# EAGLE board BoosterHC HAT V0_1 (EAGLE 8.1.0)
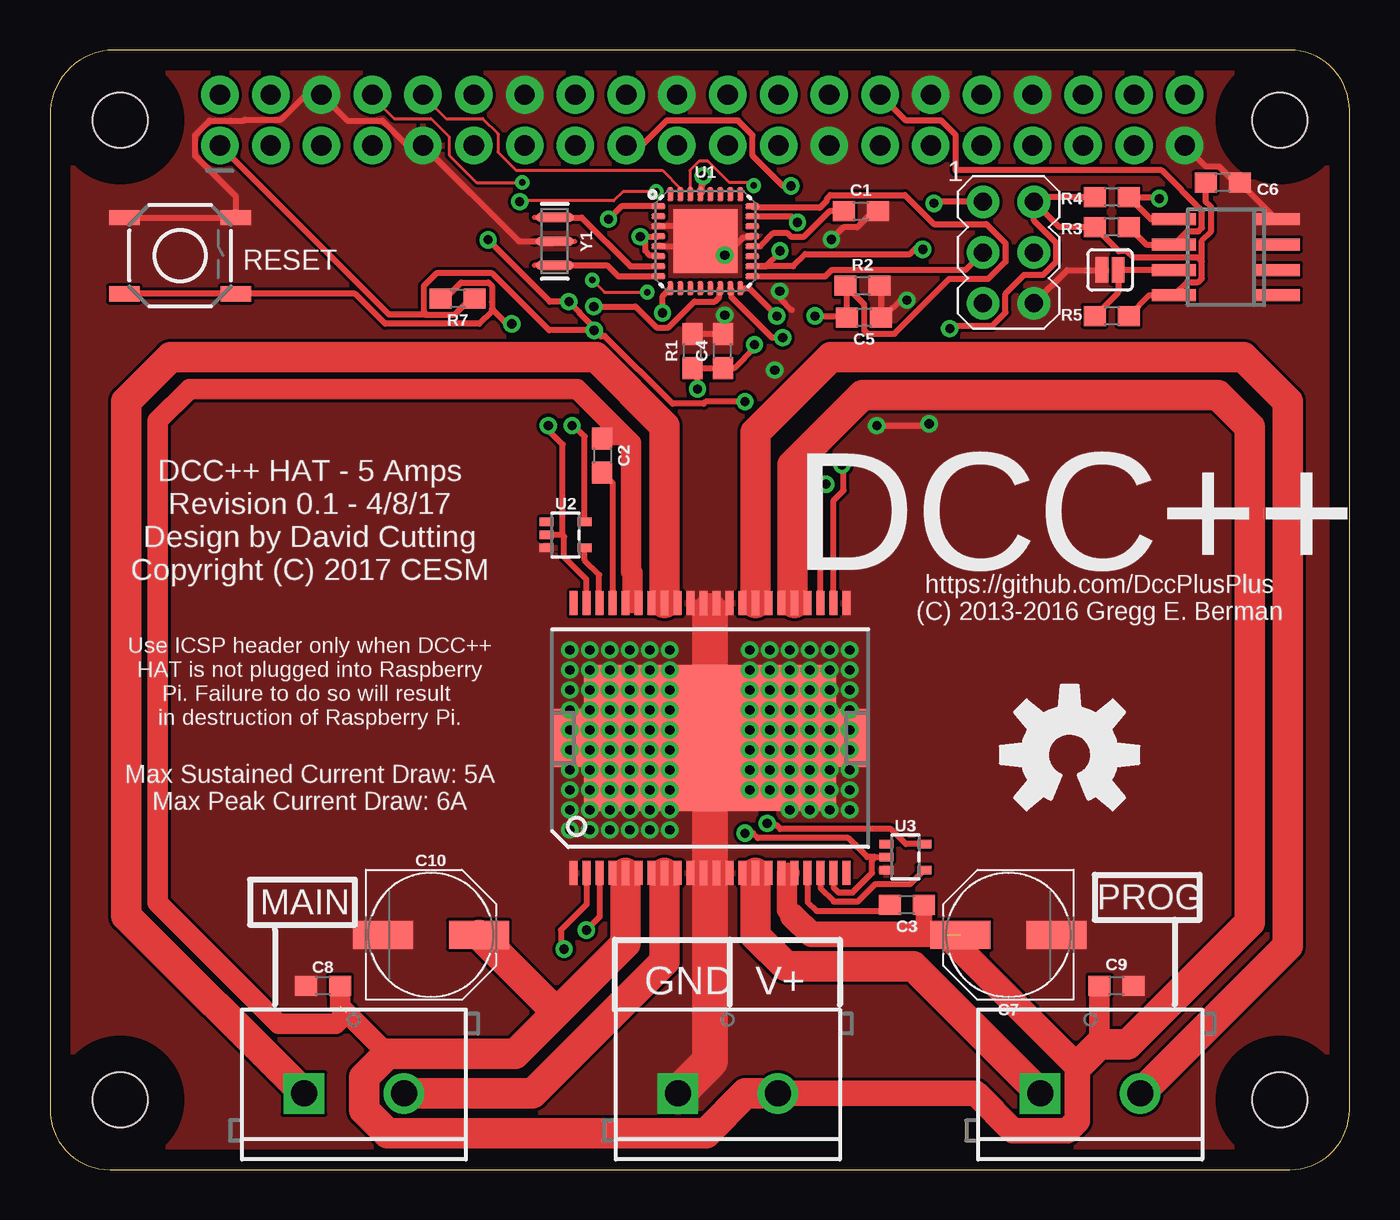
[diagram p0: board, top side]
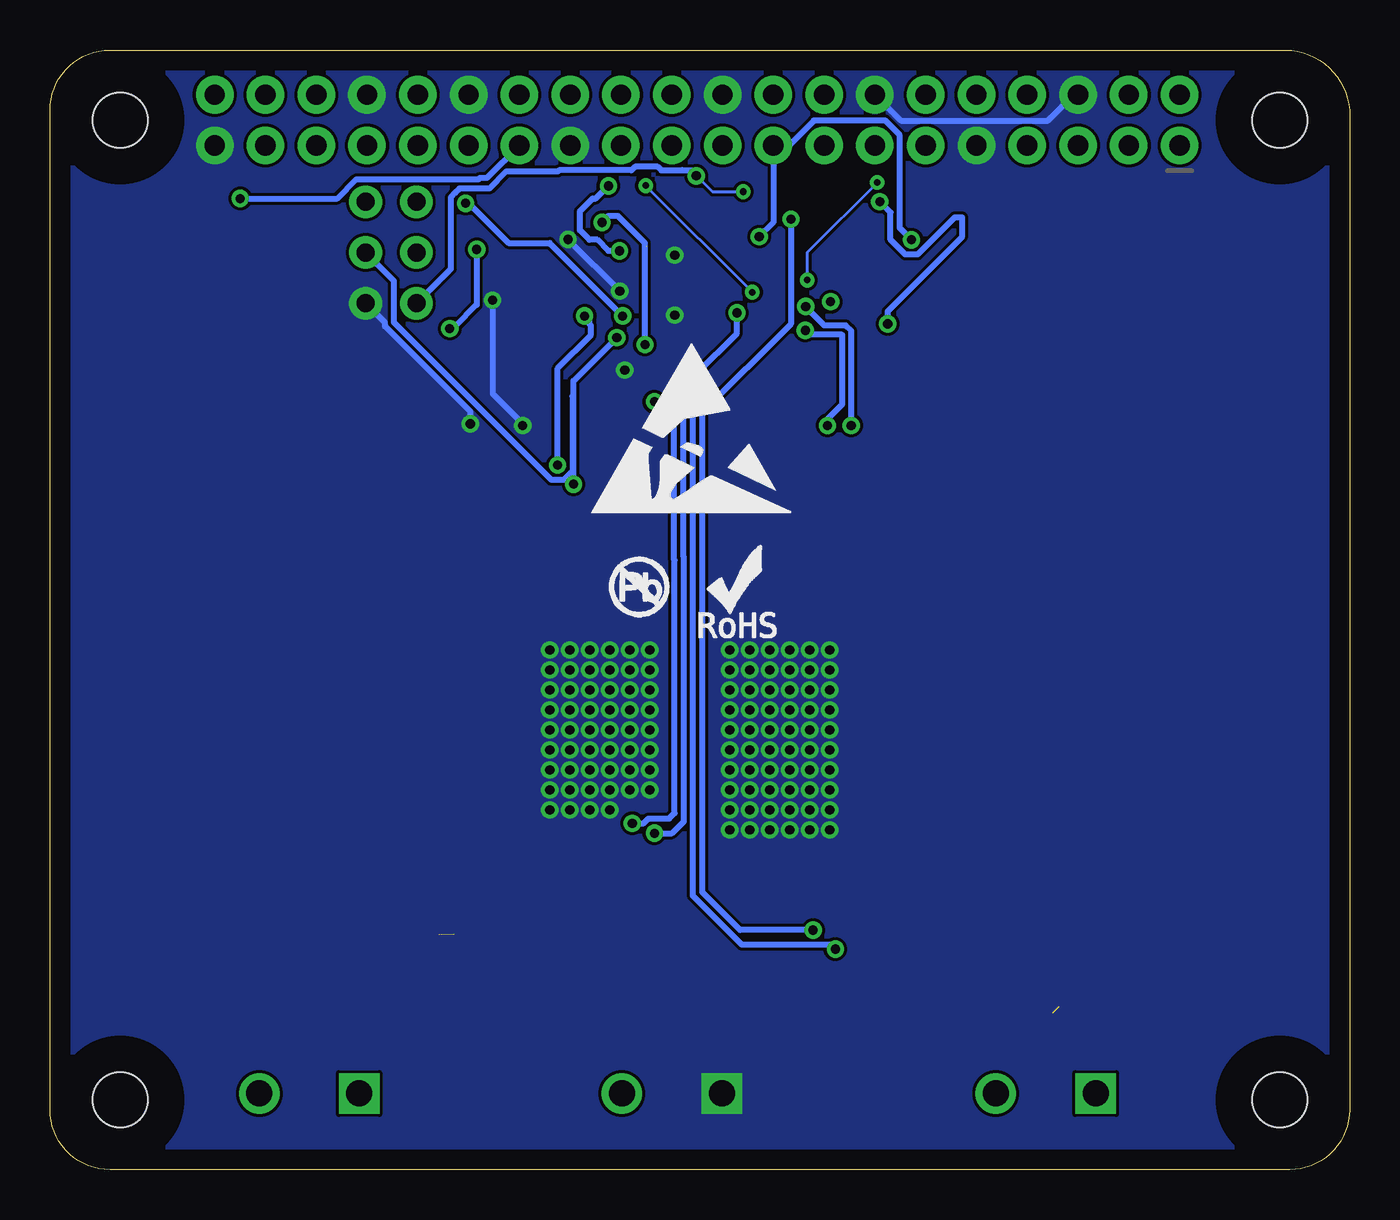
[diagram p1: board, bottom side, seen from below]

Size 65 x 56.01 mm. Coordinates in mm from the lower left corner, seen from the top.
Outline: 3,0 62,0 arc90 65,3 65,53 arc90 62,56 3.5,56 arc90 0,53 0,3 arc90 3,0
Copper layers (1*16): Top 0.035mm / dielectric 1.5mm / Bottom 0.035mm
Design rules "default *": minimum track width 6mil, minimum drill 13mil, track to track 6mil, track to pad 6mil, pad to pad 6mil, via to via 6mil, smd to smd 6mil, copper to edge 40mil, drill to drill 8mil, minimum pad ring 10mil, minimum via ring 8mil, stop-mask expansion 4mil, vias tented up to drill 25mil, thermal gap 0mil
Holes 2.75 mm at 3.5,3.5 61.5,3.5 3.5,52.5 61.5,52.5
tRestrict: area 1.9,1.9 to 5.1,5.1; area 59.9,1.9 to 63.1,5.1; area 1.9,50.9 to 5.1,54.1; area 59.9,50.9 to 63.1,54.1
bRestrict: area 1.9,50.9 to 5.1,54.1; area 1.9,1.9 to 5.1,5.1; area 59.9,1.9 to 63.1,5.1; area 59.9,50.9 to 63.1,54.1

## Footprints (pad centres in the part's own frame; a part is rotated, then mirrored left to right if it is on the bottom)
0603 = smd 1.1 x 1: 1 -0.85,0; 2 0.85,0
PANASONIC_D = smd 3 x 1.4: + 2.4,0; - -2.4,0
HSOP44 = smd 0.4 x 1.2: 1 -6.825,-6.75; 2 -6.175,-6.75; 3 -5.525,-6.75; 4 -4.875,-6.75; 5 -4.225,-6.75; 6 -3.575,-6.75; 7 -2.925,-6.75; 8 -2.275,-6.75; 9 -1.625,-6.75; 10 -0.975,-6.75; 11 -0.325,-6.75; 12 0.325,-6.75; 13 0.975,-6.75; 14 1.625,-6.75; 15 2.275,-6.75; 16 2.925,-6.75; 17 3.575,-6.75; 18 4.225,-6.75; 19 4.875,-6.75; 20 5.525,-6.75; 21 6.175,-6.75; 22 6.825,-6.75; 23 6.825,6.75; 24 6.175,6.75; 25 5.525,6.75; 26 4.875,6.75; 27 4.225,6.75; 28 3.575,6.75; 29 2.925,6.75; 30 2.275,6.75; 31 1.625,6.75; 32 0.975,6.75; 33 0.325,6.75; 34 -0.325,6.75; 35 -0.975,6.75; 36 -1.625,6.75; 37 -2.275,6.75; 38 -2.925,6.75; 39 -3.575,6.75; 40 -4.225,6.75; 41 -4.875,6.75; 42 -5.525,6.75; 43 -6.175,6.75; 44 -6.825,6.75 | smd 12.6 x 7.3: EH@1 0,0 | smd 1.7 x 2.9: EH@2 -7.15,0; EH@3 7.15,0
SO-08 = smd 0.6 x 2.2: 1 -1.905,-2.6; 2 -0.635,-2.6; 3 0.635,-2.6; 4 1.905,-2.6; 5 1.905,2.6; 6 0.635,2.6; 7 -0.635,2.6; 8 -1.905,2.6
AVRISP = drill 0.9 pad 1.626: 1 -1.27,2.54; 2 1.27,2.54; 3 -1.27,0; 4 1.27,0; 5 -1.27,-2.54; 6 1.27,-2.54
SCREWTERMINAL-5MM-2 = drill 1.3 pad 2.032 square: 1 0,0 | drill 1.3 pad 2.032: 2 5,0
2X20_NOSILK = drill 1.016 pad 1.88: 1 0,0; 2 0,2.54; 3 2.54,0; 4 2.54,2.54; 5 5.08,0; 6 5.08,2.54; 7 7.62,0; 8 7.62,2.54; 9 10.16,0; 10 10.16,2.54; 11 12.7,0; 12 12.7,2.54; 13 15.24,0; 14 15.24,2.54; 15 17.78,0; 16 17.78,2.54; 17 20.32,0; 18 20.32,2.54; 19 22.86,0; 20 22.86,2.54; 21 25.4,0; 22 25.4,2.54; 23 27.94,0; 24 27.94,2.54; 25 30.48,0; 26 30.48,2.54; 27 33.02,0; 28 33.02,2.54; 29 35.56,0; 30 35.56,2.54; 31 38.1,0; 32 38.1,2.54; 33 40.64,0; 34 40.64,2.54; 35 43.18,0; 36 43.18,2.54; 37 45.72,0; 38 45.72,2.54; 39 48.26,0; 40 48.26,2.54
SMT-JUMPER_2_NO_SILK = smd 0.635 x 1.27: 1 -0.406,0; 2 0.406,0
TACTILE_SWITCH_SMD_5.2MM = smd 1.524 x 0.762: 1 -2.794,1.905; 2 2.794,1.905; 3 -2.794,-1.905; 4 2.794,-1.905
MLF32-PAD = smd 0.7 x 0.3: 1 -2.35,1.75; 2 -2.35,1.25; 3 -2.35,0.75; 4 -2.35,0.25; 5 -2.35,-0.25; 6 -2.35,-0.75; 7 -2.35,-1.25; 8 -2.35,-1.75; 17 2.35,-1.75; 18 2.35,-1.25; 19 2.35,-0.75; 20 2.35,-0.25; 21 2.35,0.25; 22 2.35,0.75; 23 2.35,1.25; 24 2.35,1.75 | smd 0.3 x 0.7: 9 -1.75,-2.35; 10 -1.25,-2.35; 11 -0.75,-2.35; 12 -0.25,-2.35; 13 0.25,-2.35; 14 0.75,-2.35; 15 1.25,-2.35; 16 1.75,-2.35; 25 1.75,2.35; 26 1.25,2.35; 27 0.75,2.35; 28 0.25,2.35; 29 -0.25,2.35; 30 -0.75,2.35; 31 -1.25,2.35; 32 -1.75,2.35 | smd 3.2 x 3.2: PAD 0,0
SOT353 = smd 0.42 x 0.7: 1 -0.65,-0.95; 2 0,-0.95; 3 0.65,-0.95; 4 0.65,0.95; 5 -0.65,0.95
RESONATOR-SMD-3.2X1.3 = smd 0.45 x 1.905: 1 -1.2,0; 2 0,0; 3 1.2,0

## Placement (x,y rotation side)
C1  0.1uF  [0603]  40.56,47.94 0 top
C2  33nF  [0603]  27.62,35.72 270 top
C3  33nF  [0603]  42.86,13.26 180 top
C4  1.0uF  [0603]  33.66,40.96 90 top
C5  1.0uF  [0603]  40.72,42.62 180 top
C6  100nF  [0603]  58.66,49.37 180 top
C7  100uF  [PANASONIC_D]  47.94,11.75 180 top
C8  100nF  [0603]  13.65,9.21 180 top
C9  100nF  [0603]  53.34,9.21 0 top
C10  100uF  [PANASONIC_D]  19.05,11.75 0 top
IC1  MC33932  [HSOP44]  33.02,21.59 0 top
IC2  CAT24C32WI-GT3  [SO-08]  58.82,45.64 90 top
ISP1  AVRISP-6  [AVRISP]  47.94,45.88 0 top
J2  [SCREWTERMINAL-5MM-2]  12.7,3.81 0 top
J3  [SCREWTERMINAL-5MM-2]  49.53,3.81 0 top
J4  [SCREWTERMINAL-5MM-2]  31.4,3.81 0 top
J5  CONN_20X2NOSILK  [2X20_NOSILK]  8.5,51.23 0 top
JP1  JUMPER-SMT_2_NO_SILK  [SMT-JUMPER_2_NO_SILK]  53.02,45.01 180 top
R1  200  [0603]  32.15,40.96 90 top
R2  200  [0603]  40.64,44.21 0 top
R3  3.9K  [0603]  53.1,47.15 180 top
R4  3.9K  [0603]  53.1,48.66 180 top
R5  1K  [0603]  53.1,42.7 0 top
R7  10K  [0603]  20.4,43.58 180 top
S1  MOMENTARY  [TACTILE_SWITCH_SMD_5.2MM]  6.51,45.72 0 top
U1  [MLF32-PAD]  32.78,46.43 0 top
U2  74HC1G04  [SOT353]  25.8,31.75 270 top
U3  74HC1G04  [SOT353]  42.78,15.64 270 top
U$1  [OSHW-LOGO-L]  51,20.75 0 top
U$2  [ROHS_LOGO_0.18_IN]  32.75,26.5 0 bottom
U$3  [NO_PB_LOGO_0.120]  37.25,27.25 0 bottom
U$4  [ESD_10.00]  38,32.75 0 bottom
Y1  8MHz  [RESONATOR-SMD-3.2X1.3]  25.24,46.43 270 top

## Library data of the parts
C1 = SparkFun-Capacitors; PROD_ID: CAP-08604
C2 C3 C6 = SparkFun-Capacitors; PROD_ID: CAP-07887
C4 C5 = SparkFun-Capacitors; PROD_ID: CAP-00868
C7 C10 = SparkFun-Capacitors; PROD_ID: CAP-12547
C8 C9 = SparkFun-Capacitors; PROD_ID: CAP-08605
IC1 = freescale; MPN: MC33932VW; OC_FARNELL: 1701639; OC_NEWARK: 67P3304
IC2 = microchip; MPN: IS24C32A-2GLI; OC_FARNELL: 1224413; OC_NEWARK: 43M4588
ISP1 = adafruit
J2-J4 = SparkFun-Connectors; SF_SKU: PRT-08432
J5 = SparkFun-Connectors
JP1 = SparkFun-Jumpers
R1-R5 R7 = SparkFun-Resistors; PROD_ID: RES-08220
S1 = SparkFun-Switches; PROD_ID: SWCH-08247; SF_SKU: COM-08720
U1 = SparkFun-IC-Microcontroller
U2 U3 = SparkFun-IC-Logic; PROD_ID: COMP-08268
U$1-U$3 = SparkFun-Aesthetics
U$4 = logo
Y1 = SparkFun-Clocks; PROD_ID: XTAL-08895

## Nets
3.3V: C6.2 IC2.8 ISP1.2 J5.1 J5.17 R3.2 R4.2 R5.2 R7.1 U1.4 U1.6 U1.18 U2.5 U3.5
12V: C2.1 C3.1 C7.+ C8.1 C9.1 C10.+ IC1.4 IC1.5 IC1.6 IC1.17 IC1.18 IC1.26 IC1.27 IC1.28 IC1.39 IC1.40 J4.2
!DCC_SIGNAL_PIN_MAIN: IC1.42 U2.4
!DCC_SIGNAL_PIN_PROG: IC1.20 U3.4
ARDUINO_MISO: ISP1.1 U1.16
ARDUINO_RESET: ISP1.5 R7.2 S1.3 S1.4 U1.29
ARDUINO_RXD: J5.8 U1.30
ARDUINO_SCK: ISP1.3 U1.17
ARDUINO_TXD: J5.10 U1.31
CHRG_PUMP_CAP_MAIN: C2.2 IC1.41
CHRG_PUMP_CAP_PROG: C3.2 IC1.19
CURRENT_MONITOR_PIN_MAIN: C4.1 IC1.2 R1.1 U1.23
CURRENT_MONITOR_PIN_PROG: C5.2 IC1.24 R2.1 U1.24
DCC_OUTPUT_MAIN_A: IC1.7 IC1.8 IC1.9 J2.2
DCC_OUTPUT_MAIN_B: IC1.36 IC1.37 IC1.38 J2.1
DCC_OUTPUT_PROG_A: IC1.29 IC1.30 IC1.31 J3.2
DCC_OUTPUT_PROG_B: IC1.14 IC1.15 IC1.16 J3.1
DCC_SIGNAL_PIN_MAIN: IC1.43 U1.14 U2.2
DCC_SIGNAL_PIN_PROG: IC1.21 U1.9 U3.2
GND: C1.2 C4.2 C5.1 C6.1 C7.- C8.2 C9.2 C10.- IC1.1 IC1.10 IC1.11 IC1.12 IC1.13 IC1.23 IC1.32 IC1.33 IC1.34 IC1.35 IC1.EH@1 IC1.EH@2 IC1.EH@3 IC2.4 ISP1.6 J4.1 J5.6 J5.9 J5.14 J5.20 J5.25 J5.30 J5.34 J5.39 JP1.2 R1.2 R2.2 S1.1 S1.2 U1.3 U1.5 U1.21 U1.PAD U2.3 U3.3 Y1.2
ID_SC: IC2.6 J5.28 R3.1
ID_SD: IC2.5 J5.27 R4.1
N$4: IC2.7 JP1.1 R5.1
N$7: U1.8 Y1.3
N$8: U1.7 Y1.1
N$9: C1.1 U1.20
SIGNAL_ENABLE_PIN_MAIN: IC1.3 U1.1
SIGNAL_ENABLE_PIN_PROG: IC1.25 ISP1.4 U1.15

## Tracks (layer width: path | path; a pad name or v marks a point on that pad's centre or on a via)
3.3V  (via drill 0.46)
  Top 0.305: U3.5 42.82,16.29 42.06,17.05 36.53,17.05 36.35,17.22 35.98,17.22 v35.88,17.33 | U2.5 26.75,36.67 26.19,37.23 v26.11,37.23 | R5.2 54.98,43.74 IC2.8 56.88,44.4 57.44,44.4 57.62,44.58 57.62,45.43 | 57.62,45.43 57.44,45.61 54.21,45.61 53.87,45.95 53.45,45.95 R3.2 50.48,47.15 ISP1.2 | R4.2 49.45,48.66 ISP1.2 | R7.1 21.03,43.58 20.23,42.77 18.73,42.77 | J5.1 16.96,42.77 18.73,42.77 | U1.4 v29.53,46.67 29.78,46.42 29.78,45.95 30,45.73 30.39,45.73 U1.6 | 18.73,42.77 18.73,42.91 18.7,42.95 18.7,44.2 19.33,44.84 22.11,44.84 24.97,41.99 v27.22,41.99 27.5,41.71 27.64,41.71 | 57.62,45.43 57.62,46.47 58.08,46.93 58.08,48.16 57.81,48.43 C6.2 | v43.66,46.04 43.5,46.2 43.42,46.2 43.02,45.8 37.78,45.8 37.17,45.18 U1.18 35.82,45.18 36.51,45.88 v36.51,45.96 | v45.01,42.07 45.16,42.22 47.13,42.22 47.79,42.88 47.79,43.82 48.73,44.76 49.67,44.76 50.33,45.42 50.33,46.34 49.21,47.46 ISP1.2 | v34.77,38.42 32.79,38.42 32.69,38.32 31.14,38.32 27.75,41.71 27.64,41.71 | v25.96,43.42 26.47,42.91 26.47,42.88 27.64,41.71 | v25.96,43.42 25.8,43.58 | v25.96,43.42 25,43.42 v21.91,46.51 | J5.17 29.6,51.23 30.84,52.48 34.42,52.48 35.15,51.75 35.15,50.71 36.65,49.21 v37.07,49.21
  Bottom 0.305: v35.88,17.33 35.31,17.33 35.07,17.56 34.03,17.56 33.76,17.84 33.76,30.48 33.78,30.5 33.78,37.35 34.61,38.18 34.61,38.26 v34.77,38.42 | v26.11,37.23 26.11,37.54 25.38,38.28 25.38,41.77 27.01,41.77 27.07,41.83 v27.22,41.99 | v29.53,46.67 28.82,47.38 J5.17 28.04,51.23 26.8,52.48 23.22,52.48 22.5,51.75 22.5,47.1 v21.91,46.51 | v43.66,46.04 43.66,43.26 44.77,42.15 44.93,42.15 v45.01,42.07 | v36.51,45.96 37.07,45.96 37.62,46.51 38.02,46.51 38.5,46.99 38.5,47.94 37.86,48.58 37.7,48.58 v37.07,49.21
12V  (2 unrouted)
  Top 0.305: IC1.40 29.13,28.34 IC1.39 | IC1.26 IC1.27 IC1.28 | IC1.4 IC1.5 IC1.6 | IC1.18 36.86,14.84 IC1.17
  Top 0.813: C3.1 43.71,11.86 43.81,11.76
  Top 1.016: 37.15,12.7 36.86,12.99 36.86,14.84 36.98,14.84 | 51.44,5.23 51.38,5.17 | C9.1 52.49,6.28 | 16.88,5.79 14.5,8.17 C8.1 | 14.83,7.84 14.29,7.3 11.43,7.3 5.4,13.34 5.4,37.47 6.99,39.05 26.35,39.05 28.65,36.75 | 28.65,36.75 29.05,36.35 29.05,29.92 29.13,29.84 29.13,28.34 | C2.1 27.8,36.75 28.65,36.75
  Top 1.27: J4.2 46.31,3.81 48.17,1.96 50.89,1.96 51.38,2.45 51.38,5.17 44.8,11.76 43.81,11.76 38.09,11.76 37.15,12.7
  Top 1.524: J4.2 34.8,3.81 32.82,1.83 16.88,1.83 15.72,2.99 15.72,4.63 16.88,5.79 23.25,5.79 25.4,7.94 | IC1.5 28.8,11.33 25.4,7.94 | C10.+ 25.26,7.94 25.4,7.94 | IC1.27 37.15,28.44 37.15,35.24 40.64,38.73 58.42,38.73 60.01,37.15 60.01,12.38 53.9,6.28 52.49,6.28 51.44,5.23
!DCC_SIGNAL_PIN_MAIN
  Top 0.305: IC1.42 27.46,28.37 27.46,29.77 26.75,30.48 U2.4
!DCC_SIGNAL_PIN_PROG
  Top 0.305: IC1.20 38.55,14.08 39.21,13.41 40.4,13.41 41.27,14.29 43.03,14.29 U3.4
ARDUINO_MISO  (via drill 0.46)
  Top 0.305: v44.21,48.34 44.29,48.42 ISP1.1 | U1.16 34.97,44.08 v36.35,42.7
  Bottom 0.305: v44.21,48.34 44.05,48.34 42.07,46.35 40.01,46.35 v36.35,42.7 36.27,42.62
ARDUINO_RESET  (via drill 0.33, 0.46)
  Top 0.152: 22.22,42.95 22.25,42.98 22.1,42.95 | v30.33,48.92 28.65,48.92 28.19,48.46 23.62,48.46 v23.5,48.42
  Top 0.305: S1.3 S1.4 15.27,43.81 16.77,42.31 21.47,42.31 22.1,42.95 22.1,44.2 21.93,44.38 20.57,44.38 19.77,43.58 R7.2 | v32.68,49.71 32.68,49.32 32.58,49.22 32.58,48.83 U1.29 | 22.1,43.42 22.1,43.06 22.22,42.95 22.94,42.23 23.02,42.23 v23.1,42.31
  Bottom 0.152: v30.33,48.92 31.85,48.92 32.61,49.68 v32.68,49.71
  Bottom 0.305: 44.73,48.86 44.52,49.08 | 44.73,48.86 44.95,48.64 44.95,45.06 ISP1.5 | v32.68,49.71 32.62,49.77 32.62,50.01 33.36,50.01 33.38,49.98 34.42,49.98 34.59,50.16 35.74,50.16 35.92,49.98 39.55,49.98 39.61,49.93 42.18,49.93 43.02,49.08 44.51,49.08 44.73,48.86 | v23.1,42.31 23.1,42.94 19.37,46.67 19.37,47.62 19.75,47.62 21.6,45.78 22.21,45.78 22.95,46.52 22.95,47.88 v23.5,48.42
ARDUINO_RXD  (via drill 0.33)
  Top 0.152: v35.2,49.23 35.05,49.38 33.98,49.38 32.92,50.44 32.46,50.44 32,49.99 32,48.92 U1.30 | v29.87,43.89 27.74,43.89 v27.13,44.5 | v23.62,49.38 21.34,49.38 19.96,50.75 19.96,51.66 19.05,52.58 17.22,52.58 16.15,53.65 J5.8
  Bottom 0.152: v29.87,43.89 v35.2,49.23 | v27.13,44.5 27.13,45.87 v23.62,49.38
ARDUINO_SCK
  Top 0.305: U1.17 38.78,44.68 39.11,45.02 45.81,45.02 ISP1.3
ARDUINO_TXD
  Top 0.152: U1.31 31.55,48.92 31.55,49.07 30.63,49.99 23.32,49.99 22.4,50.9 22.4,51.82 21.64,52.58 19.81,52.58 18.75,53.65 J5.10
CHRG_PUMP_CAP_MAIN
  Top 0.305: C2.2 28.14,34.35 IC1.41
CHRG_PUMP_CAP_PROG
  Top 0.305: IC1.19 37.9,13.38 38.34,12.94 41.85,12.94 C3.2
CURRENT_MONITOR_PIN_MAIN  (via drill 0.46)
  Top 0.305: IC1.2 26.84,13.27 25.56,11.99 25.56,11.27 25.64,11.19 25.64,11.11 v25.72,11.03 | v32.38,39.05 32.38,39.87 R1.1 C4.1 34.23,40.11 35.24,41.12 v35.24,41.27 | U1.23 37.09,47.68 v37.39,47.39
  Bottom 0.305: v25.72,11.03 25.93,11.25 30.39,11.25 32.84,13.7 32.84,30.86 | 32.86,30.88 32.84,30.86 | v32.38,39.05 32.84,38.59 32.84,30.86 | v35.24,41.27 35.24,46.35 36.59,47.7 37.07,47.7 v37.39,47.39 37.54,47.23
CURRENT_MONITOR_PIN_PROG  (via drill 0.46)
  Top 0.305: IC1.24 39.2,33.48 39.69,33.97 39.69,35.16 v39.61,35.24 | v38.26,42.7 39.79,42.7 C5.2 39.87,44.13 R2.1 40.72,43.29 40.72,42 40.89,41.82 42.25,41.82 44.99,44.56 46.93,44.56 47.79,45.42 47.79,46.34 46.83,47.3 44.21,47.3 42.76,48.75 39.03,48.75 38.86,48.57 38.86,48.46 38.5,48.1 38.46,48.14 35.18,48.14 U1.24
  Bottom 0.305: v39.61,35.24 39.61,40.08 37.94,41.75 37.94,42.23 38.02,42.31 38.02,42.47 v38.26,42.7
DCC_OUTPUT_MAIN_A
  Top 0.305: IC1.7 IC1.8 IC1.9
  Top 1.524: J2.2 24.13,3.81 30.75,10.43 IC1.8
DCC_OUTPUT_MAIN_B
  Top 0.305: IC1.36 IC1.37 IC1.38
  Top 1.524: J2.1 3.81,12.7 3.81,38.42 6.03,40.64 27.3,40.64 30.75,37.2 IC1.37
DCC_OUTPUT_PROG_A
  Top 0.305: IC1.31 IC1.30 IC1.29
  Top 1.524: J3.2 61.91,11.19 61.91,38.42 59.69,40.64 39.05,40.64 35.3,36.88 IC1.30
DCC_OUTPUT_PROG_B
  Top 0.305: IC1.14 IC1.15 IC1.16
  Top 1.524: J3.1 43.18,10.16 36.83,10.16 35.3,11.7 IC1.15
DCC_SIGNAL_PIN_MAIN  (via drill 0.46)
  Top 0.305: IC1.43 26.83,28.36 26.83,29.53 25.72,30.64 25.72,31.67 25.64,31.75 | 25.64,31.75 U2.2 | 25.64,31.75 25.64,36.27 24.92,36.99 v24.92,37.23 | U1.14 33.49,44.04 33.49,43.65 33.26,43.43 32.25,43.43 30.94,42.13 30.33,42.13 29.28,43.18 v27.2,43.18
  Bottom 0.305: v27.2,43.18 27.28,43.26 27.3,43.26 26.27,42.23 25.19,42.23 24.92,41.96 v24.92,37.23
DCC_SIGNAL_PIN_PROG  (via drill 0.46)
  Top 0.305: IC1.21 39.2,14.13 39.45,13.87 40.15,13.87 41.12,14.84 41.12,15.48 41.27,15.64 | 41.27,15.64 U3.2 | 41.27,15.64 40.88,15.64 39.93,16.59 35.4,16.59 35.16,16.83 v34.77,16.83 | v30.64,42.86 30.64,43.69 U1.9
  Bottom 0.305: v34.77,16.83 33.89,16.83 33.3,17.42 33.3,30.67 33.32,30.69 33.32,37.6 33.34,37.62 33.34,39.14 32.69,39.79 32.68,39.79 30.64,41.83 v30.64,42.86
GND  (via drill 0.46)
  Top 0.305: IC1.10 IC1.11 33.02,15.16 33.02,15.24 | 33.02,13.97 33.02,14.52 IC1.12 IC1.13 | IC1.35 IC1.34 33.02,28.02 | 33.02,28.02 IC1.33 IC1.32 | 33.02,28.02 33.02,27.94 | JP1.2 50.88,45.01 ISP1.6 | IC2.4 61.33,47.55 C6.1 59.29,49.37 58.48,50.18 57.81,50.18 J5.39 | S1.1 S1.2 9.3,48.67 7.25,50.71 7.25,51.75 7.98,52.48 9.02,52.48 9.02,52.47 9.68,52.47 9.74,52.52 11.56,52.52 12.8,53.77 J5.6 14.88,52.48 16.64,52.48 17.88,51.23 J5.9 23.46,46.43 Y1.2 | U1.5 32.53,46.18 | 32.53,46.18 U1.PAD | U1.3 32.11,47.18 32.15,47.15 32.15,46.57 32.53,46.18 | U1.21 35.09,46.64 34.7,46.64 34.24,46.18 | 34.24,46.18 32.53,46.18 | C4.2 R1.2 | R2.2 41.57,44.13 C5.1 41.67,42.62 42.7,43.66 v42.86,43.5 | v41.35,37.23 43.89,37.23 v43.97,37.31 | U1.PAD 33.99,46.43 34.24,46.18 | U1.PAD 33.07,46.43 v33.75,45.75 | v39.09,46.54 39.69,47.14 40.39,47.14 41.19,47.94 C1.2 | v36.5,43.95 36.5,43.6 37.09,43.01
  Top 1.778: J4.1 33.02,5.43 33.02,13.97 33.02,15.24 IC1.EH@1 33.02,27.94
  Bottom 0.305: J5.14 22.45,52.48 15.08,52.48 13.79,53.77 J5.6 | v42.86,43.5 42.86,38.81 41.27,37.23 v41.35,37.23 | v43.97,37.31 43.97,37.92 48.25,42.19 48.25,42.37 ISP1.6 | v39.09,46.54 v39.09,46.53 v36.5,43.95
  other vias: 26,26 27,26 28,26 29,26 30,26 31,26 26,25 27,25 28,25 29,25 30,25 31,25 26,24 27,24 28,24 29,24 30,24 31,24 26,23 27,23 28,23 29,23 30,23 31,23 26,22 27,22 28,22 29,22 30,22 31,22 26,21 27,21 28,21 29,21 30,21 31,21 26,20 27,20 28,20 29,20 30,20 31,20 26,19 27,19 28,19 29,19 30,19 31,19 26,18 27,18 28,18 29,18 30,18 31,18 26,17 27,17 28,17 29,17 30,17 31,17 35,26 36,26 37,26 38,26 39,26 40,26 35,25 36,25 37,25 38,25 39,25 40,25 35,24 36,24 37,24 38,24 39,24 40,24 35,23 36,23 37,23 38,23 39,23 40,23 35,22 36,22 37,22 38,22 39,22 40,22 35,21 36,21 37,21 38,21 39,21 40,21 35,20 36,20 37,20 38,20 39,20 40,20 35,19 36,19 37,19 38,19 39,19 40,19 37,18 38,18 39,18 40,18 33.75,42.75 36.25,40
  pour Top: 65,0 65,56 0,56 0,0 65,0
  pour Bottom: 0,0 65,0 65,56 0,56
ID_SC
  Top 0.305: R3.1 54.83,46.28 IC2.6 56.88,46.94 57.44,46.94 57.62,47.12 57.62,47.97 55.61,49.98 45.3,49.98 45.3,51.75 44.58,52.48 42.81,52.48 J5.28
ID_SD  (via drill 0.46)
  Top 0.305: IC2.5 55.06,47.55 R4.1 55.4,48.66 v55.48,48.58
  Bottom 0.305: v55.48,48.58 50.63,48.58 49.67,49.54 43.57,49.54 43.5,49.61 43.14,49.61 J5.27
N$4
  Top 0.305: IC2.7 JP1.1 53.43,43.88 R5.1
N$7
  Top 0.305: Y1.3 25.25,45.24 27.86,45.24 28.42,44.68 U1.8
N$8
  Top 0.305: Y1.1 25.25,47.62 26.59,47.62 29.03,45.18 U1.7
N$9  (1 unrouted)
  Top 0.305: C1.1 38.98,47.94 37.69,46.65 37.08,46.65 36.89,46.84 36.17,46.84 35.52,46.18 U1.20
SIGNAL_ENABLE_PIN_MAIN  (via drill 0.46)
  Top 0.305: IC1.3 27.5,12.65 v26.83,11.99 | U1.1 28.58,48.18 v27.94,47.55
  Bottom 0.305: v26.83,11.99 30.48,11.99 32.38,13.89 32.38,37.86 27.94,42.31 v27.94,47.55
SIGNAL_ENABLE_PIN_PROG  (via drill 0.46)
  Top 0.305: IC1.25 38.55,34.18 38.58,34.21 38.73,34.21 v38.81,34.29 | U1.15 34.08,44.04 34.08,43.65 36.11,41.62 v36.65,41.62
  Bottom 0.305: v38.81,34.29 38.81,38.73 | 38.81,38.73 38.81,39.45 v36.65,41.62 | ISP1.4 47.79,44.46 47.79,42.38 39.91,34.51 39.3,34.51 38.87,34.94 38.87,38.68 38.81,38.73

## Text on the board
tNames: RESET | DCC++ HAT - 5 Amps / Revision 0.1 - 4/8/17 / Design by David Cutting / Copyright (C) 2017 CESM | DCC++ | https://github.com/DccPlusPlus / (C) 2013-2016 Gregg E. Berman | Use ICSP header only when DCC++ / HAT is not plugged into Raspberry / Pi. Failure to do so will result / in destruction of Raspberry Pi. | Max Sustained Current Draw: 5A / Max Peak Current Draw: 6A | MAIN | PROG | GND V+
_tNames: U1 | C1 | R4 | C6 | R3 | Y1 | R2 | R7 | C5 | R5 | R1 | C4 | C2 | U2 | U3 | C10 | C3 | C8 | C9 | C7